# EAGLE board week6helloEcho (EAGLE 8.0.2)
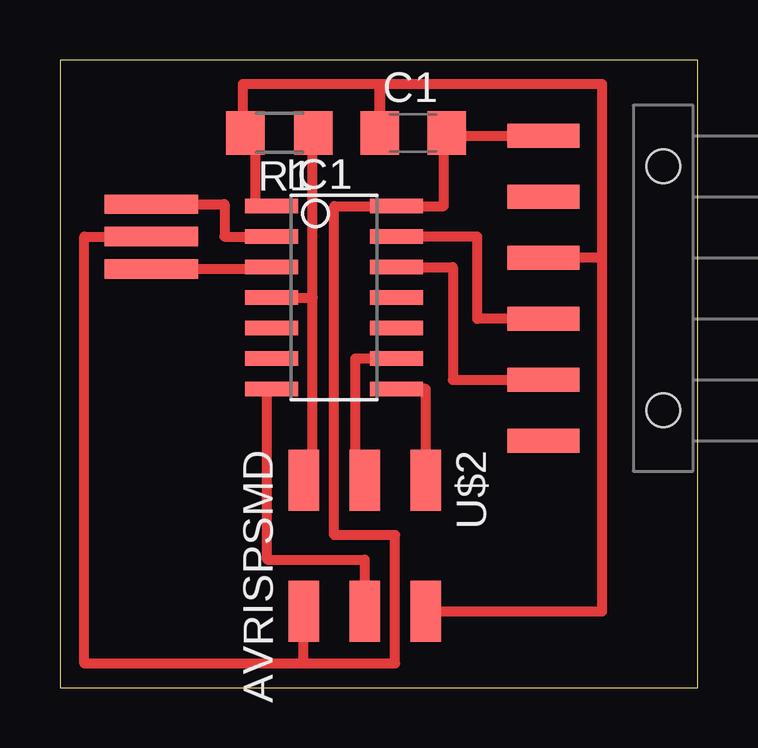
[diagram p0: board, top side]

Size 26.59 x 26.15 mm. Coordinates in mm from the lower left corner, seen from the top.
Outline: 0,0 26.59,0 26.59,26.15 0,26.15 0,0
Copper layers 1: Top 0.035mm
Design rules "ERP-1sided-10mil-16mill": minimum track width 10mil, minimum drill 24mil, track to track 16mil, track to pad 16mil, pad to pad 16mil, via to via 16mil, smd to smd 0mil, copper to edge 16mil, drill to drill 36mil, minimum pad ring 10mil, minimum via ring 8mil, stop-mask expansion 4mil, vias tented up to drill 0mil, thermal gap 10mil

## Footprints (pad centres in the part's own frame; a part is rotated, then mirrored left to right if it is on the bottom)
C1206 = smd 1.6 x 1.8: 1 -1.4,0; 2 1.4,0
SOIC14 = smd 0.61 x 2.21: 1 -3.81,-2.603; 2 -2.54,-2.603; 3 -1.27,-2.603; 4 0,-2.603; 5 1.27,-2.603; 6 2.54,-2.603; 7 3.81,-2.603; 8 3.81,2.603; 9 2.54,2.603; 10 1.27,2.603; 11 0,2.603; 12 -1.27,2.603; 13 -2.54,2.603; 14 -3.81,2.603
1X06-SMD = smd 1 x 3: 1 -6.35,5; 2 -3.81,5; 3 -1.27,5; 4 1.27,5; 5 3.81,5; 6 6.35,5 | hole 1.4: -5.08,0; 5.08,0
R1206 = smd 1.6 x 1.803: 1 -1.422,0; 2 1.422,0
EFOBM = smd 0.8 x 3.9: 1 -1.35,0; 2 0,0; 3 1.35,0
2X03SMD = smd 2.54 x 1.27: 1 -2.54,2.54; 2 2.92,2.54; 3 -2.54,0; 4 2.92,0; 5 -2.54,-2.54; 6 2.92,-2.54

## Placement (x,y rotation side)
C1  1uf  [C1206]  14.73,23.11 0 top
IC1  ATTINY44-SSU  [SOIC14]  11.43,16.26 270 top
JP1  [1X06-SMD]  25.15,16.64 90 top
R1  10k  [R1206]  9.14,23.11 180 top
U$1  RESONATOR  [EFOBM]  3.81,18.8 270 top
U$2  AVRISPSMD  [2X03SMD]  12.7,6.1 270 top

## Library data of the parts
C1 = rcl
IC1 U$1 U$2 = fab
JP1 = SparkFun
R1 = resistor

## Nets
CTS: JP1.5
GND: C1.2 IC1.14 JP1.6 U$1.2 U$2.6
MISO: IC1.8 U$2.1
MOSI: IC1.7 U$2.4
N$1: IC1.2 U$1.1
N$2: IC1.3 U$1.3
RST: IC1.4 R1.1 U$2.5
RTS: JP1.1
RX: IC1.12 JP1.2
SCK: IC1.9 U$2.3
TX: IC1.13 JP1.3
VCC: C1.1 IC1.1 JP1.4 R1.2 U$2.2

## Tracks (layer width: path | path; a pad name or v marks a point on that pad's centre or on a via)
GND
  Top 0.406: 10.16,1.02 13.97,1.02 13.97,6.35 11.43,6.35 11.43,20.07 IC1.14 16,20.07 16,23.11 C1.2 16.13,22.99 JP1.6 20.15,23.24 | U$1.2 1.02,18.8 1.02,1.02 10.16,1.02 | U$2.6 10.16,1.02
MISO
  Top 0.406: IC1.8 15.24,12.45 U$2.1
MOSI
  Top 0.406: IC1.7 8.64,12.45 8.64,5.33 12.7,5.33 U$2.4
N$1
  Top 0.406: U$1.1 6.86,20.15 6.86,18.8 IC1.2
N$2
  Top 0.406: U$1.3 8.83,17.45 IC1.3
RST
  Top 0.406: R1.1 10.54,23.11 10.54,16.26 | IC1.4 10.54,16.26 | U$2.5 10.54,8.64 10.54,16.26
RX
  Top 0.406: IC1.12 16.38,17.53 16.38,12.83 JP1.2
SCK
  Top 0.406: U$2.3 12.32,8.64 12.32,13.72 IC1.9
TX
  Top 0.406: JP1.3 17.4,15.37 17.4,18.8 IC1.13
VCC
  Top 0.254: 22.61,4.32 22.61,4.42
  Top 0.406: 22.61,17.91 JP1.4 | 22.61,17.91 22.61,4.32 22.61,3.18 U$2.2 | IC1.1 8.13,20.07 8.13,23.11 R1.2 7.62,23.11 7.62,25.15 13.33,25.15 C1.1 13.34,25.15 22.61,25.15 22.61,17.91